# Altium PCB Carte_Servo_Robot_2_PCB.PcbDoc
Units mil, origin at the board's own origin, x right, y up, seen from the top; angles counter-clockwise.
Board outline 3937.01 x 2755.91 mil, 4 copper layers (Top Layer, Internal Plane 1, Internal Plane 2, Bottom Layer); 37 components, 31 nets, 115 pads, 0 vias.
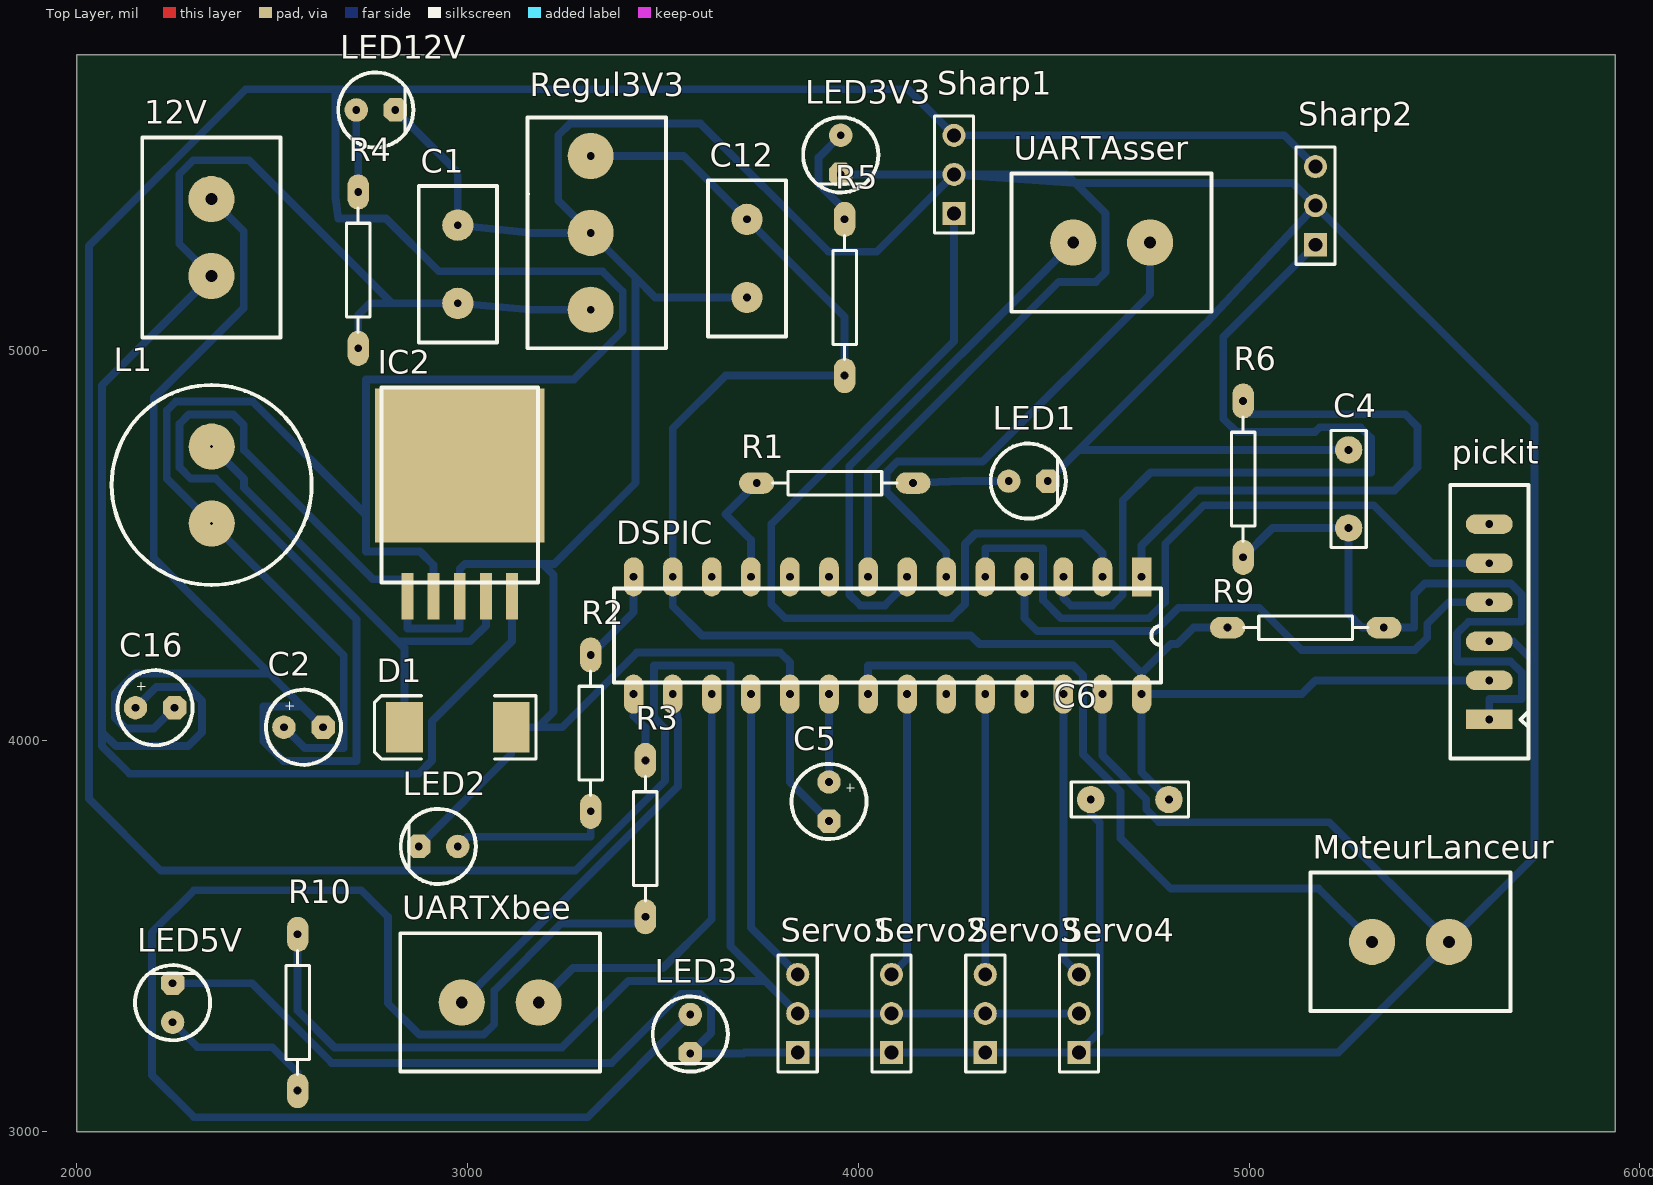
[diagram p0: Top Layer view]
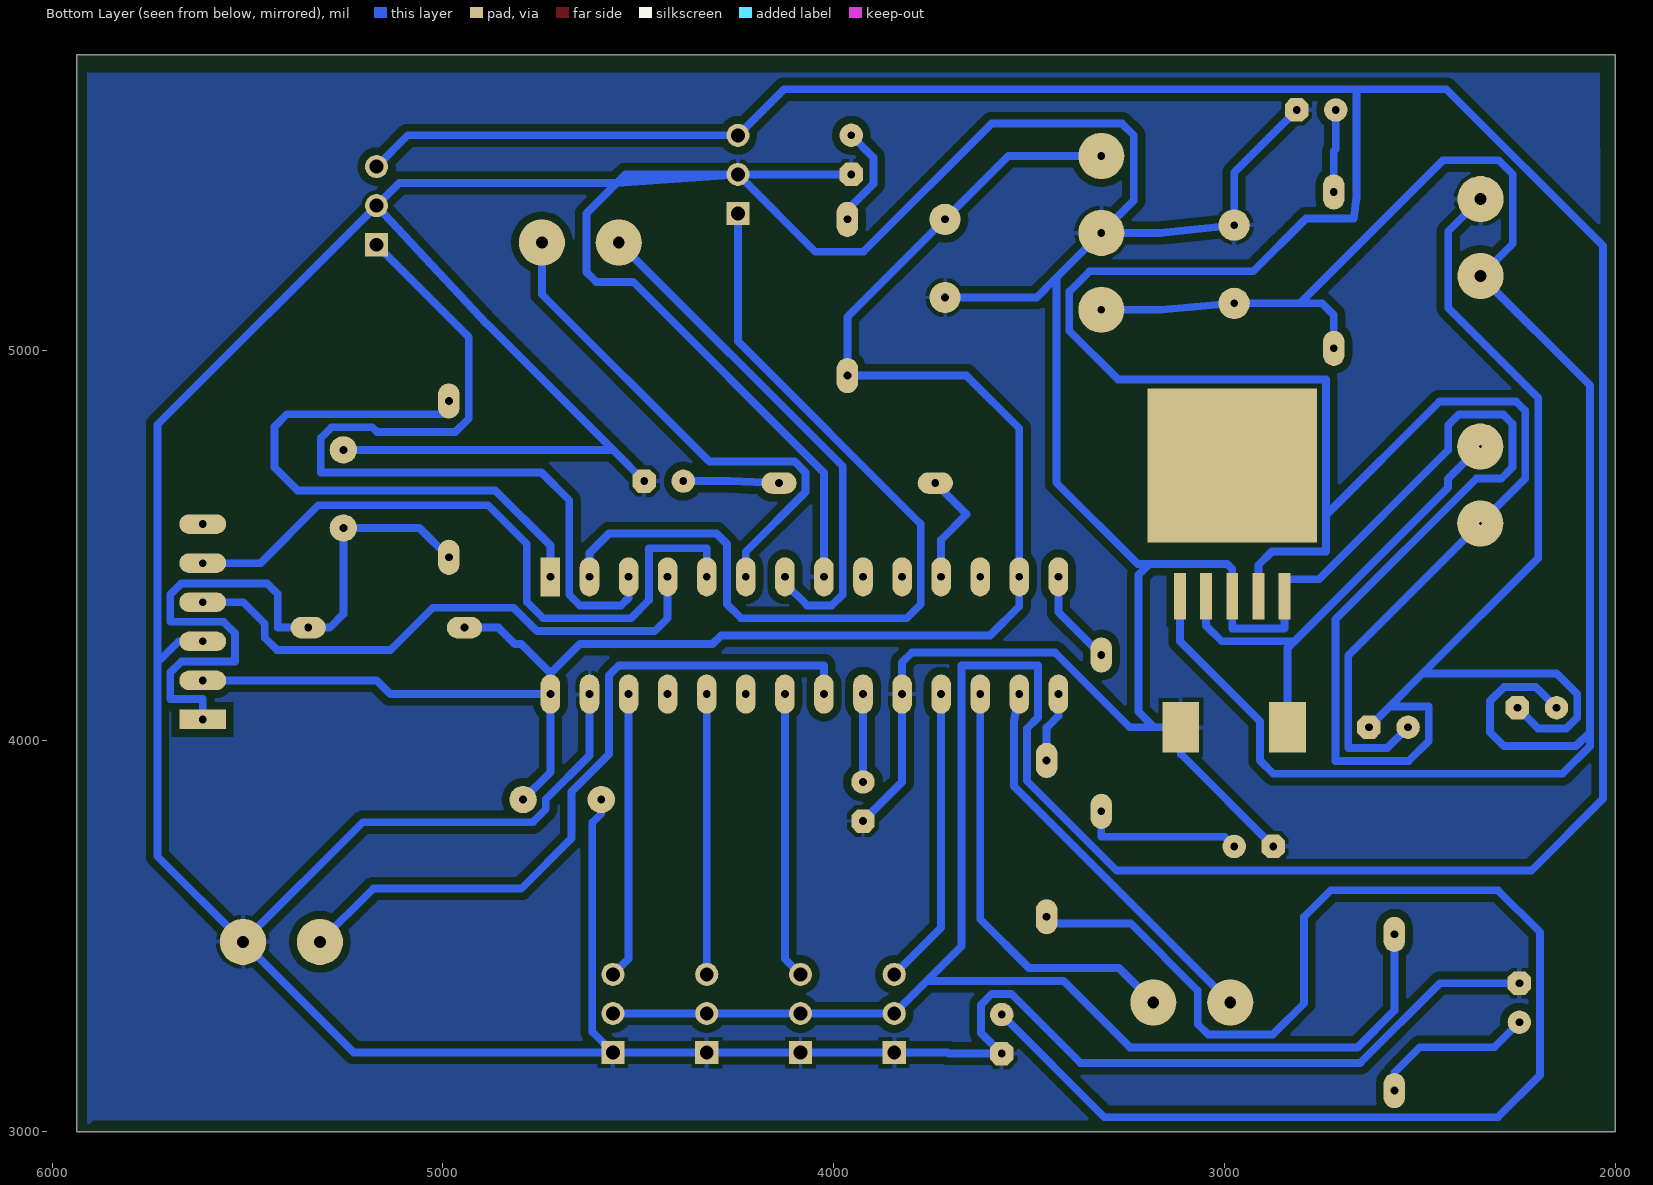
[diagram p1: Bottom Layer view, seen from below]
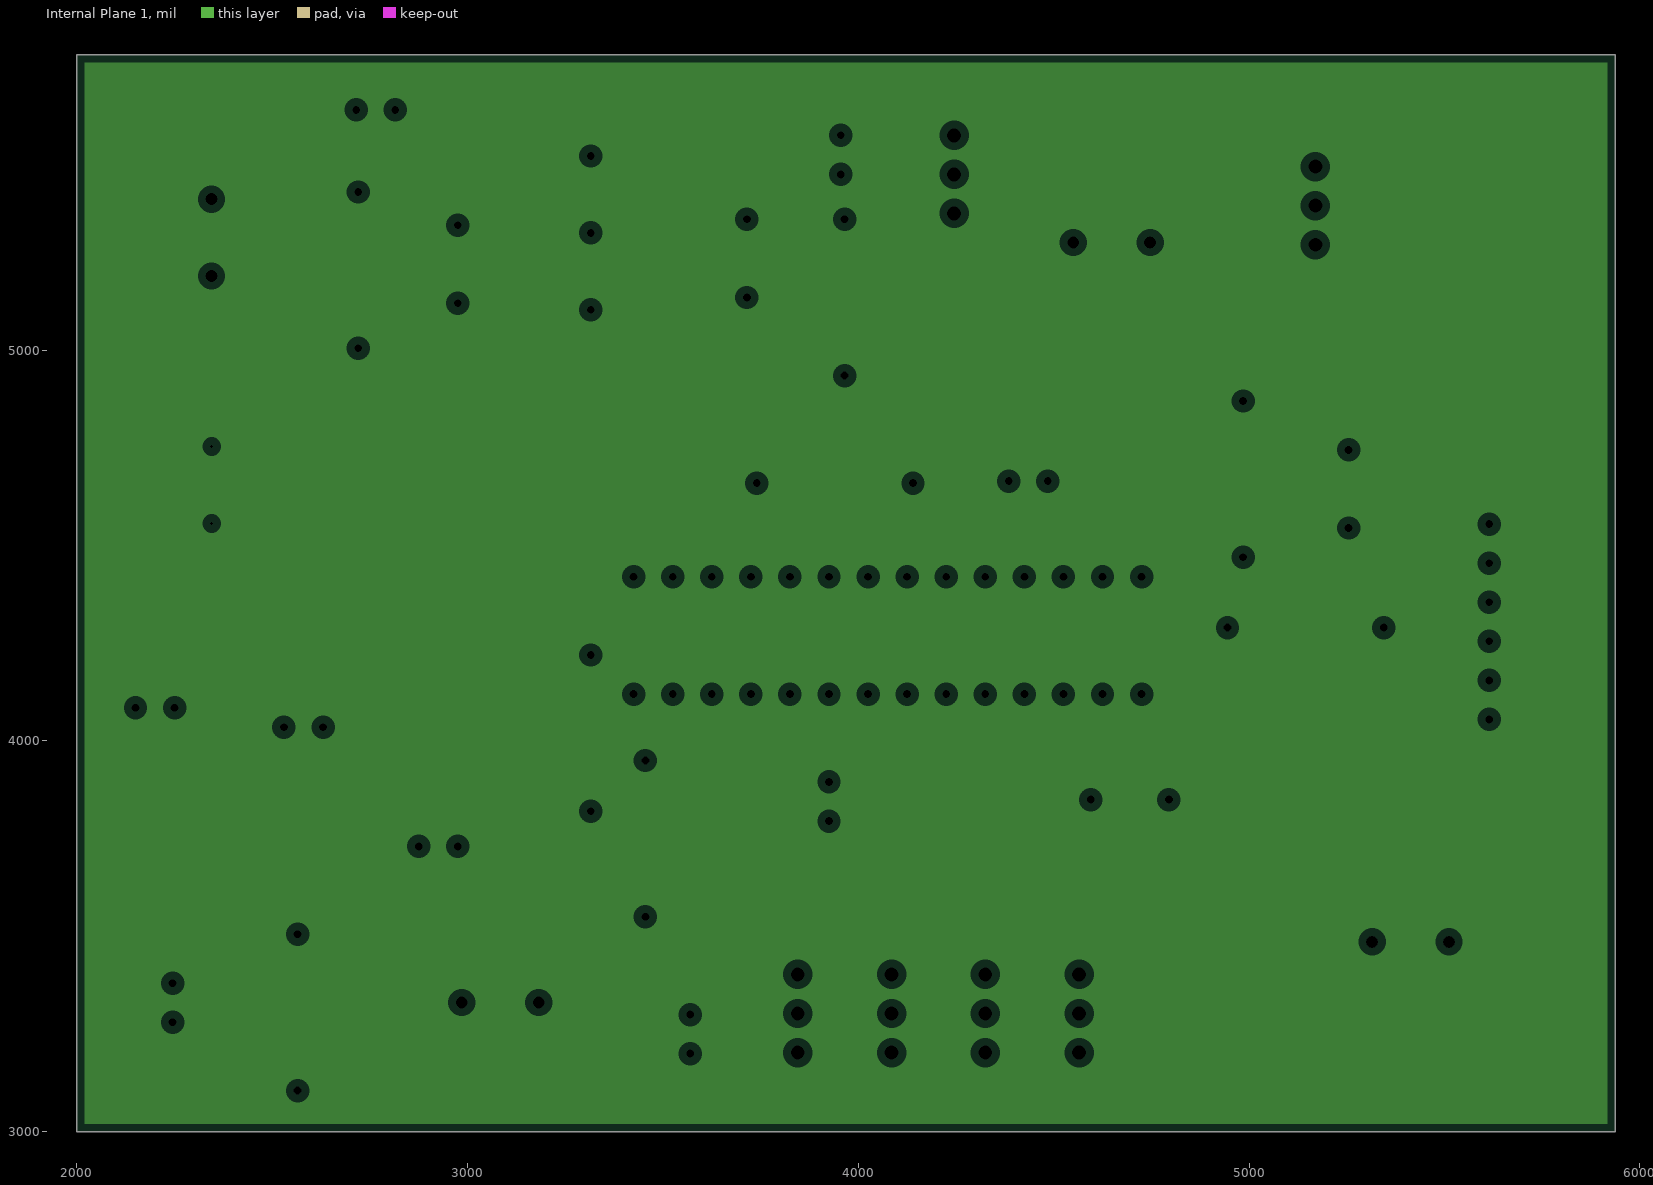
[diagram p2: Internal Plane 1, clearances drawn from the general rule]
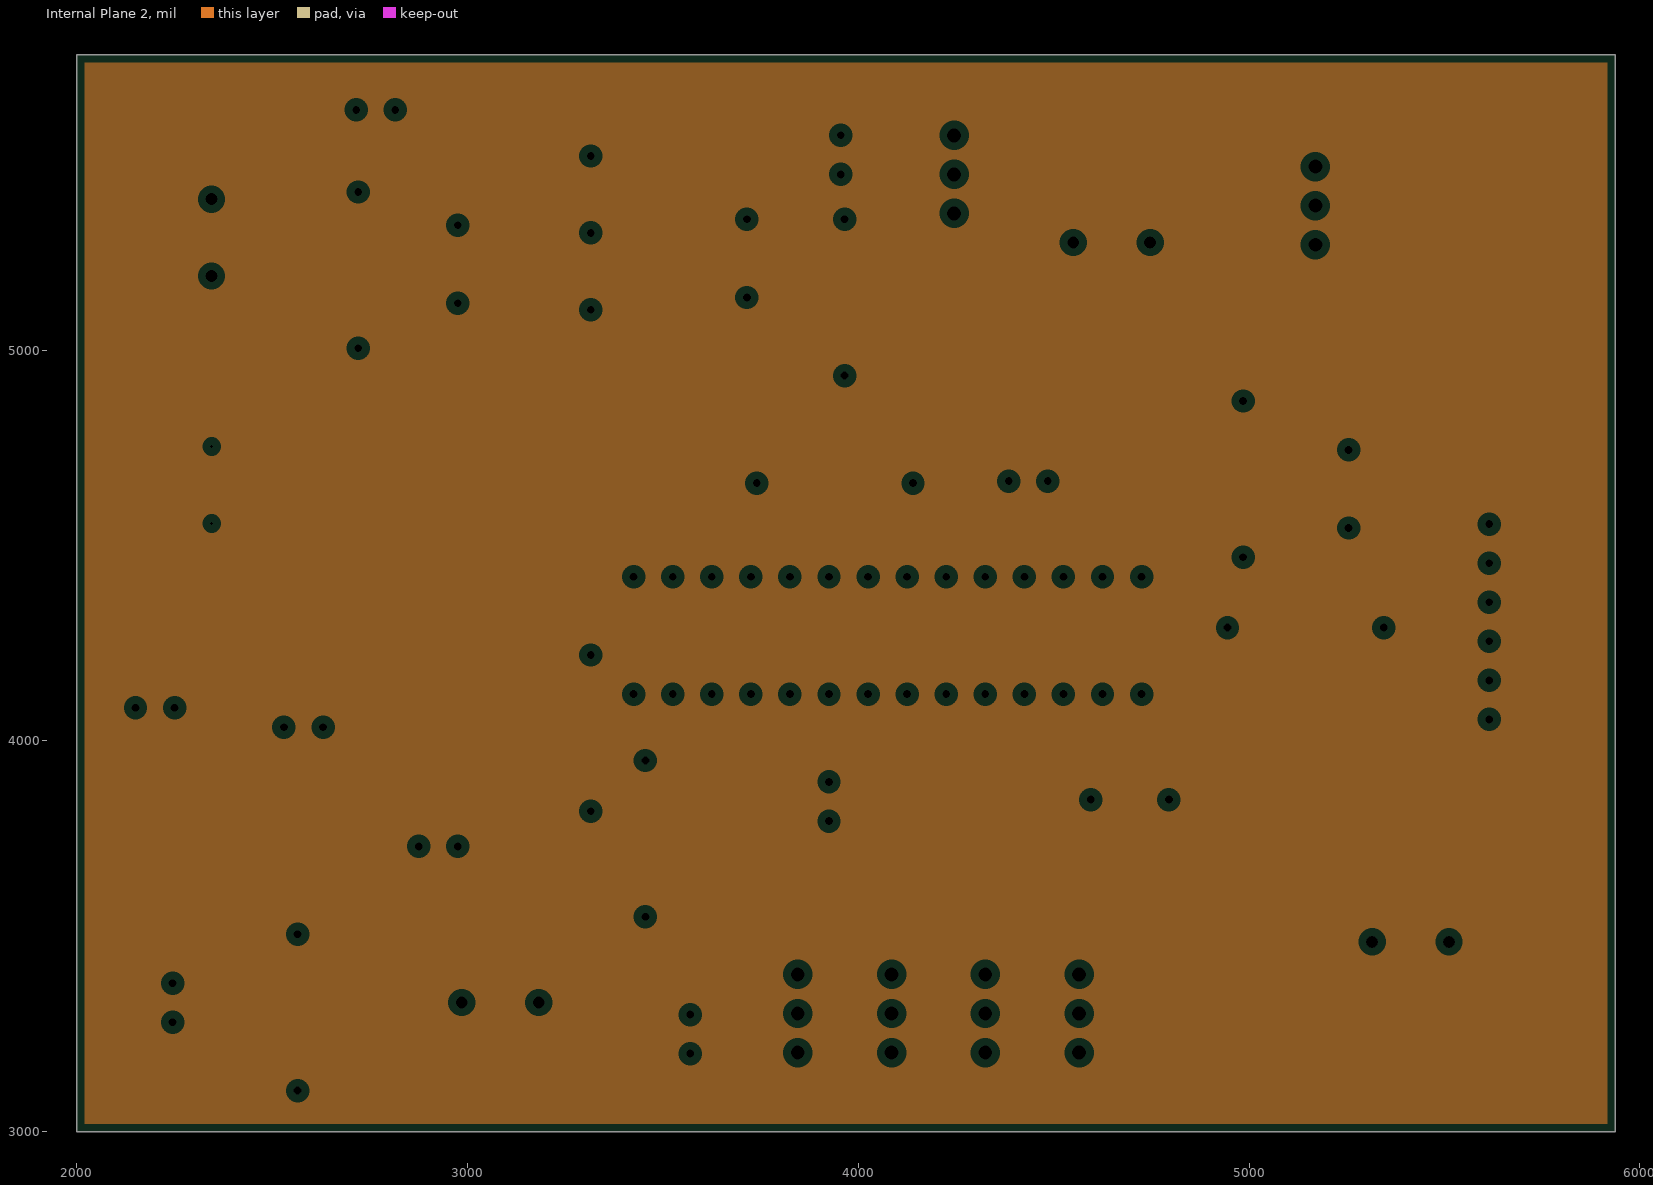
[diagram p3: Internal Plane 2, clearances drawn from the general rule]

## Layer stack, top to bottom
Top Layer: signal copper 1.4
Dielectric: dielectric 12.6, FR-4, Dk 4.8
Internal Plane 1: plane copper 1.4
Dielectric: dielectric 12.6, FR-4, Dk 4.8
Internal Plane 2: plane copper 1.4
Dielectric: dielectric 12.6, FR-4, Dk 4.8
Bottom Layer: signal copper 1.4

## Board outline
2000,3000 5937.01,3000 5937.01,5755.91 2000,5755.91

## Design rules (kind name [scope] priority, off if disabled: settings)
Clearance [All] p1: gap=13
FabricationTestPointUsage TestPointUsage [All] p1: valid=0 allowmultiple=FALSE
FabricationTestpoint Testpoint [All] p1: side=3 testpointundercomponent=TRUE minsize=40 maxsize=100 preferedsize=60 minholesize=0 maxholesize=40 preferedholesize=32 testpointgrid=1 allowsidetop=TRUE allowsidebottom=TRUE usegrid=TRUE gridtolerance=0.01
PlaneClearance [All] p1: clearance=20
PlaneConnect [All] p1: planeconnectstyle=Relief reliefexpansion=20 reliefentries=4 reliefconductorwidth=10 reliefairgap=10
PolygonConnect [All] p1: connectstyle=Relief reliefconductorwidth=10 reliefentries=4 polygonreliefangle="90 Angle" airgapwidth=10
RoutingLayers [All] p1: top layer_v5=FALSE bottom layer_v5=TRUE
RoutingVias [All] p1: holewidth=20 width=70 viastyle="Through Hole" minholewidth=28 minwidth=50 maxholewidth=28 maxwidth=50
SilkscreenOverComponentPads [All] p1: minsilkscreentomaskgap=10
SolderMaskExpansion [All] p1: expansion=4
Width [All] p1: maxlimit=20 minlimit=20 preferedwidth=20
22 further rules are at their usual default settings.

## Classes and differential pairs
net class Undefined: 3.3V 5V 12V GND HEATSINK NetD1_2

## Components (designator, comment, footprint, x,y, rotation, side; value= is the part's Value field where it differs from the comment)
12V "Bornier" Bornier 2305,5190 r90 top
C1 "Cap2" CAPA2 2975,5120 r90 top
C2 "470uF" Capa_pol1 2525,4035 r0 top
C4 "100nF" Capa_plastique 5255,4745 r270 top
C5 "10uF" Capa_pol1 3925,3900 r270 top
C6 "0.1uF" Capa_plastique 4795,3850 r180 top
C12 "Cap2" CAPA2 3715,5135 r90 top
C16 "470uF" Capa_pol1 2145,4085 r0 top
D1 "Schottky B340" SMC 2975,4035 r180 top
DSPIC "dsPIC33FJ128MC802" DIP28 4725,4420 r270 top
IC2 "TS2596" TO263-5L 2980,4705 r0 top
L1 "Inductance" self 2345,4655 r270 top
LED1 "LED" Led_5mm 4435,4660 r0 top
LED2 "LED" Led_5mm 2925,3735 r180 top
LED3 "LED" Led_5mm 3565,3249.64 r270 top
LED3V3 "LED" Led_5mm 3950,5500 r270 top
LED5V "LED" Led_5mm 2250,3330 r90 top
LED12V "LED" Led_5mm 2765,5610 r0 top
MoteurLanceur "Bornier" Bornier 5315,3525 r0 top
pickit "pickit3" pickit3 5615,4055 r90 top
R1 "240ohms" "traversant 1/4W" 3880,4660 r0 top
R2 "240ohm" "traversant 1/4W" 3315,4080 r270 top
R3 "240ohm" "traversant 1/4W" 3455,3810 r270 top
R4 "750ohms" "traversant 1/4W" 2720,5145 r90 top
R5 "130ohms" "traversant 1/4W" 3965,5075 r90 top
R6 "470ohm" "traversant 1/4W" 4985,4730 r270 top
R9 "10kohm" "traversant 1/4W" 5085,4290 r0 top
R10 "240ohms" "traversant 1/4W" 2565,3365 r270 top
Regul3V3 "Bornier_3" Bornier_3 3315,5005 r90 top
Servo1 "Header 3" HDR1X3 3845,3202.4 r90 top
Servo2 "Header 3" HDR1X3 4085,3202.4 r90 top
Servo3 "Header 3" HDR1X3 4325,3202.4 r90 top
Servo4 "Header 3" HDR1X3 4565,3202.4 r90 top
Sharp1 "Header 3" HDR1X3 4245,5350 r90 top
Sharp2 "Header 3" HDR1X3 5170,5270 r90 top
UARTAsser "Bornier" Bornier 4550,5315 r0 top
UARTXbee "Bornier" Bornier 2985,3370 r0 top

## Footprints (in the part's own frame and the unit in brackets; to place one, negate y for a bottom-side part, rotate by r counter-clockwise, add the part's x,y. Pads: shape width x height; smd on the part's side, far side on the other; paste and mask are expansions set on the pad)
Bornier [mm]
  round 3 hole 0.762: 1(0,-1) 2(5,-1)
  silkscreen extent -4,-5.5 9,3.5
Bornier_3 [mm]
  round 3 hole 0.508: 1(2.5,0) 2(7.5,0) 3(12.5,0)
  silkscreen extent 0,-4.9 15,4.1
CAPA2 [mil]
  round 80 hole 20: 1(0,0) 2(200,0)
  silkscreen extent -100,-100 300,100
Capa_plastique [mil]
  round 70 hole 20: 1(0,0) 2(200,0)
  silkscreen extent -50,-45 250,45
Capa_pol1 [mil]
  round 60 hole 20: 1(5,0)
  oct 60x60 hole 20: 2(105,0)
  silkscreen extent -41,-96 151,96
DIP28 [mil]
  rect 100x50 hole 20: 1(0,0)
  oval 100x50 hole 20: 2(0,-100) 3(0,-200) 4(0,-300) 5(0,-400) 6(0,-500) 7(0,-600) 8(0,-700) 9(0,-800) 10(0,-900) 11(0,-1000) 12(0,-1100) 13(0,-1200) 14(0,-1300) 15(300,-1300) 16(300,-1200) 17(300,-1100) 18(300,-1000) 19(300,-900) 20(300,-800) 21(300,-700) 22(300,-600) 23(300,-500) 24(300,-400) 25(300,-300) 26(300,-200) 27(300,-100) 28(300,0)
  silkscreen extent 30,-1350 270,50
HDR1X3 [mm] "Connector; Header; 3 Position"
  rect 1.5x1.5 hole 0.9: 1(0,0)
  round 1.5 hole 0.9: 2(2.54,0) 3(5.08,0)
  silkscreen extent -1.27,-1.27 6.35,1.27
Led_5mm [mil]
  round 60 hole 20: 1(-50,5)
  oct 60x60 hole 20: 2(50,5)
  silkscreen extent -96,-91 96,101
pickit3 [mil]
  rect 50x120 hole 20: 1(0,0)
  oval 50x120 hole 20: 2(100,0) 3(200,0) 4(300,0) 5(400,0) 6(500,0)
  silkscreen extent -100,-100 600,100
self [mm]
  round 3 hole 0.2: 1(-2.5,0) 2(2.5,0)
  silkscreen extent -6.5,-6.5 6.5,6.5
SMC [mm] "DO-214-AB/SMC; 2 C-Bend Leads; Body 7.9 x 5.9 mm, inc. leads (LxW)"
  rect 2.4x3.3 all layers, no hole: 1(-3.475,0) 2(3.475,0)
  silkscreen extent -5.08,-2.05 5.42,2.06
TO263-5L [mm]
  rect 11x10 all layers, no hole: 0(0,0)
  rect 0.77x3 all layers, no hole: 1(3.4,-8.5) 2(1.7,-8.5) 3(0,-8.5) 4(-1.7,-8.5) 5(-3.4,-8.5)
  silkscreen extent -5.08,-7.62 5.08,5.08
"traversant 1/4W" [mil]
  oval 90x55 hole 20: 1(-140,0) 2(260,0)
  silkscreen extent -99,-30 219,30

## Part data
12V MoteurLanceur UARTAsser UARTXbee: library part Bornier2
C1 C12: "Capacitor"
C2 C5 C16: library part "Capa Pol"
C4 C6: library part Capa
R1 R2 R3 R4 R5 R6 R9 R10: library part Resistance
Regul3V3 Servo1 Servo2 Servo3 Servo4 Sharp1 Sharp2: "Header, 3-Pin"

## Nets (pads, with @x,y where several pads share a name; then routed paths per layer and width w, separated by ;. In a path a pad name is that pad's centre, name@x,y a point inside that pad or via, vN(x,y) a via of type N, cw(c..) or ccw(c..) an arc to the next point about the centre after c; other vN are vias at no path point)
3.3V: C6.1 C12.2 DSPIC.13 DSPIC.28 pickit.2 R5.1 R9.1 Regul3V3.3 | length 4717.8
  Bottom Layer w20: Regul3V3.3 3552.87,5497.13 C12.2 3965,5085 R5.1 3660,4935 3525,4800 DSPIC.13 3525,4345 3600,4270 4288,4270 4310,4248 4650,4248 4725,4173 ; C6.1 4725,3920 DSPIC.28 ; R9.1 4858,4290 4816,4248 4800,4248 4725,4173 ; pickit.2 5170,4155 5135,4120 DSPIC.28 ; DSPIC.28 4725,4173
5V: C2.1 IC2.4 L1.2 R10.1 Servo1.2 Servo2.2 Servo3.2 Servo4.2 Sharp1.3 Sharp2.3 | length 14652.9
  Bottom Layer w20: C2.1 2583,3982 2683,3982 2683,4218.57 L1.2 2229.94,4671.63 2229.94,4845.48 2252.94,4868.48 2450,4868.48 2740,4578.48 ; R10.1 2565,3310 2659.43,3215.57 3241.36,3215.57 3411.43,3385.64 3761.76,3385.64 ; IC2.4 2913.07,4450 2878.07,4485 2740,4485 2740,4578.48 ; Servo4.2 Servo3.2 Servo2.2 Servo1.2 3761.76,3385.64 ; Sharp2.3 5090,5550 Sharp1.3 4127,5668 2662,5668 ; 2662,5668 2432,5668 2031,5267 2031,3852 2215,3668 3275.5,3668 3505.5,3898 3505.5,4031.5 3477,4060 3477,4193 3673,4193 3673,3474.4 3761.76,3385.64 ; 2662,5668 2662,5391 2669,5337 2791,5337 2926,5202 3345.06,5202 3397.06,5150 3397.06,5050 3272.06,4925 2740,4925 2740,4578.48
12V: 12V.1 C1.1 C16.1 IC2.1 R4.1 Regul3V3.1 | length 4983
  Bottom Layer w20: C16.1 2203,4138 2284,4138 2320,4102 2320,4022.33 2284.67,3987 2100,3987 2064,4023 ; R4.1 2720,5090 2750,5120 2806.3,5120 ; IC2.1 3113.86,4255 2909,4050.14 2909,3950 2875,3916 2135,3916 2064,3987 2064,4023 ; Regul3V3.1 3161.57,5103.43 C1.1 2806.3,5120 ; 2064,4023 2064,4909.63 12V.1 2262,5272.37 2262,5450 2298,5486 2440.3,5486 2806.3,5120
DEBUG1: DSPIC.11 R1.1 | length 300.1
  Bottom Layer w20: DSPIC.11 3725,4515 3660,4580 R1.1
DEBUG2: DSPIC.14 R2.1 | length 245.6
  Bottom Layer w20: R2.1 3425,4330 DSPIC.14
DEBUG3: DSPIC.15 R3.1 | length 182.4
  Bottom Layer w20: DSPIC.15 3425,4064 3455,4034 R3.1
GND: 12V.2 C1.2 C2.2 C4.1 C5.2 C6.2 C12.1 C16.2 D1.1 DSPIC.8 DSPIC.19 DSPIC.27 IC2.3 IC2.5 LED1.2 LED2.2 LED3.2 LED3V3.2 LED5V.2 LED12V.2 MoteurLanceur.2 pickit.3 Regul3V3.2 Servo1.1 Servo2.1 Servo3.1 Servo4.1 Sharp1.2 Sharp2.2 | length 23556.9
  Bottom Layer w20: LED5V.2 2448,3380 2652,3176 3369,3176 3545.64,3352.64 3595.36,3352.64 3623,3325 3623,3252.64 LED3.2 3706,3199.64 3708.76,3202.4 Servo1.1 Servo2.1 Servo3.1 Servo4.1 ; C16.2 2197,4032 2125,4032 2097,4060 2097,4120 2150,4173 2492,4173 ; 12V.2 2427,5304.22 2427,5107.9 2196.94,4877.84 2196.94,4468.06 2492,4173 ; C2.2 2577,4088 ; LED12V.2 2975,5455 C1.2 3164.72,5300.28 Regul3V3.2 ; LED2.2 3111.81,3966.81 D1.1 3180,4035 ; C12.1 3480.28,5135 3430.06,5185.22 ; C5.2 3825,3895 DSPIC.19 3825,4201 3800,4226 3433,4226 3242,4035 3180,4035 ; LED3V3.2 Sharp1.2 ; DSPIC.8 4025,4686.67 4513.33,5175 4608,5175 4633,5200 4633,5350 4555,5428 ; LED1.2 4565,4745 ; C6.2 4595,3814 4618,3791 4618,3255.4 Servo4.1 ; DSPIC.27 4625,3962.67 4737,3850.67 4737,3825 4770,3792 5205.48,3792 MoteurLanceur.2 ; C4.1 4565,4745 ; pickit.3 5676,4255 5731,4200 ; 2492,4173 2577,4088 ; 2577,4088 2477,4088 2477,4000 2528,3949 2716,3949 2716,4311 2355.63,4671.37 2291.57,4671.37 2262.94,4700 2262.94,4812 2286.43,4835.48 2400,4835.48 2427.06,4808.43 2427.06,4745.01 2758.07,4414 2846.14,4414 IC2.5 2846.14,4288 2980,4288 IC2.3 2980,4440 2993,4453 3192,4453 ; 3180,4035 3220,4075 3220,4425 3192,4453 ; 3192,4453 3222,4453 3430.06,4661.06 3430.06,5185.22 ; Regul3V3.2 3430.06,5185.22 ; Regul3V3.2 3232,5383.28 3232,5550 3262,5580 3596,5580 3924,5252 4047,5252 Sharp1.2 ; Sharp1.2 4555,5428 ; Sharp1.2 4533,5450 4555,5428 ; 4555,5428 5112,5428 Sharp2.2 ; Servo4.1 5228.62,3202.4 MoteurLanceur.2 ; 4565,4745 4887,5067 Sharp2.2 ; Sharp2.2 5731,4809 5731,4200 ; MoteurLanceur.2 5731,3704.78 5731,4200
HEATSINK: IC2.0
MCLR: C4.2 pickit.1 R6.2 R9.2 | length 1788.4
  Bottom Layer w20: R6.2 5060,4545 C4.2 5255,4325 5290,4290 R9.2 5423,4290 5423,4376 5450,4403 5670,4403 5698,4375 5698,4305 5562,4305 5532,4275 5532,4203 5670,4203 5698,4175 5698,4107 5615,4107 pickit.1
NetC5_1: C5.1 DSPIC.20 | length 225
  Bottom Layer w20: C5.1 DSPIC.20
NetD1_2: D1.2 IC2.2 L1.1 | length 1240.9
  Bottom Layer w20: L1.1 2427.76,4670.66 2427.76,4647.92 2820.68,4255 ; D1.2 2838.19,4237.49 2820.68,4255 ; IC2.2 3046.93,4294.93 3007,4255 2820.68,4255
NetDSPIC_1: DSPIC.1 R6.1 | length 1466.7
  Bottom Layer w20: DSPIC.1 4725,4500 4866,4641 5372,4641 5431,4700 5431,4805 5400,4836 4985,4836 R6.1
NetDSPIC_21: DSPIC.21 MoteurLanceur.1 | length 1844
  Bottom Layer w20: DSPIC.21 4025,4193 4550,4193 4575,4168 4575,3966 4671,3870 4671,3751 4800,3622 5178.63,3622 MoteurLanceur.1
NetLED1_1: LED1.1 R1.2 | length 245.1
  Bottom Layer w20: R1.2 4267,4665 LED1.1
NetLED2_1: LED2.1 R2.2 | length 415.4
  Bottom Layer w20: LED2.1 3000,3755 3315,3755 R2.2
NetLED3_1: LED3.1 R3.2 | length 3671.9
  Bottom Layer w20: R3.2 3455,3533 3240,3533 3068,3361 3068,3275 3041.57,3248.57 2876.43,3248.57 2796,3329 2796,3550 2728,3618 2300,3618 2192,3510 2192,3145 2300,3037 3307.36,3037 LED3.1
NetLED3V3_1: LED3V3.1 R5.2 | length 266.4
  Bottom Layer w20: LED3V3.1 3898,5493 3898,5426 3965,5359 R5.2
NetLED5V_1: LED5V.1 R10.2 | length 419.4
  Bottom Layer w20: LED5V.1 2309,3216 2500,3216 2565,3151 R10.2
NetLED12V_1: LED12V.1 R4.2 | length 212.1
  Bottom Layer w20: LED12V.1 2715,5515 2720,5510 R4.2
PGC: DSPIC.5 pickit.5 | length 1783.2
  Bottom Layer w20: DSPIC.5 4325,4493 4473,4493 4473,4360 4519,4314 4743.72,4314 4785.72,4356 4785.72,4504.72 4884,4603 5319,4603 5467,4455 pickit.5
PGD: DSPIC.4 pickit.4 | length 1450.7
  Bottom Layer w20: DSPIC.4 4425,4314.31 4458.31,4281 4759.48,4281 4819.48,4341 5026,4341 5134,4233 5425,4233 5456,4264 5456,4300 5511,4355 pickit.4
PWM1: DSPIC.18 Servo1.3 | length 767.3
  Bottom Layer w20: DSPIC.18 3725,3522.4 Servo1.3
PWM2: DSPIC.22 Servo2.3 | length 734.2
  Bottom Layer w20: Servo2.3 4125,3442.4 DSPIC.22
PWM3: DSPIC.24 Servo3.3 | length 717.6
  Bottom Layer w20: Servo3.3 DSPIC.24
PWM4: DSPIC.26 Servo4.3 | length 734.2
  Bottom Layer w20: DSPIC.26 4525,3442.4 Servo4.3
RXASSER: DSPIC.7 UARTAsser.1 | length 1337.2
  Bottom Layer w20: DSPIC.7 4125,4404 4068,4347 4005,4347 3977,4375 3977,4702.63 UARTAsser.1
RXXBEE: DSPIC.16 UARTXbee.1 | length 1019.9
  Bottom Layer w20: UARTXbee.1 3538.5,3884.13 3538.5,4050.75 DSPIC.16
SHARP1: DSPIC.2 Sharp1.1 | length 2318.6
  Bottom Layer w20: Sharp1.1 4245,5023 3777,4555 3777,4350 3813,4314 4237,4314 4273,4350 4273,4504 4300,4531 4575,4531 4625,4481 DSPIC.2
SHARP2: DSPIC.3 Sharp2.1 | length 2172.9
  Bottom Layer w20: DSPIC.3 4525,4366 4544,4347 4650,4347 4677,4374 4677,4616 4748,4687 5313,4687 5313,4775 5285,4803 5181,4803 5169,4791 4968,4791 4934,4825 4934,5034 Sharp2.1
TXASSER: DSPIC.6 UARTAsser.2 | length 1326.4
  Bottom Layer w20: DSPIC.6 4225,4484 4072,4637 4072,4687 4100,4715 4318.22,4715 4746.85,5143.63 UARTAsser.2
TXXBEE: DSPIC.17 UARTXbee.2 | length 1107.7
  Bottom Layer w20: UARTXbee.2 3269.86,3418.64 3500,3418.64 3625,3543.64 DSPIC.17
pads on no net: DSPIC.9 DSPIC.10 DSPIC.12 DSPIC.23 DSPIC.25 pickit.6

## Polygon pours and split planes (outlines as drawn)
GND on Bottom Layer "Bottom Layer-No Net" (solid, remove dead copper, pour order 2): 2039.89,5710 5910,5710 5910,3015 5895.17,3029.65 2030,3029.65
no net on Internal Plane 1 (split plane): 5916.91,3020.1 2020.1,3020.1 2020.1,5735.81 5916.91,5735.81
no net on Internal Plane 2 (split plane): 5916.91,3020.1 2020.1,3020.1 2020.1,5735.81 5916.91,5735.81